# EAGLE board gloria (EAGLE 6.5.0)
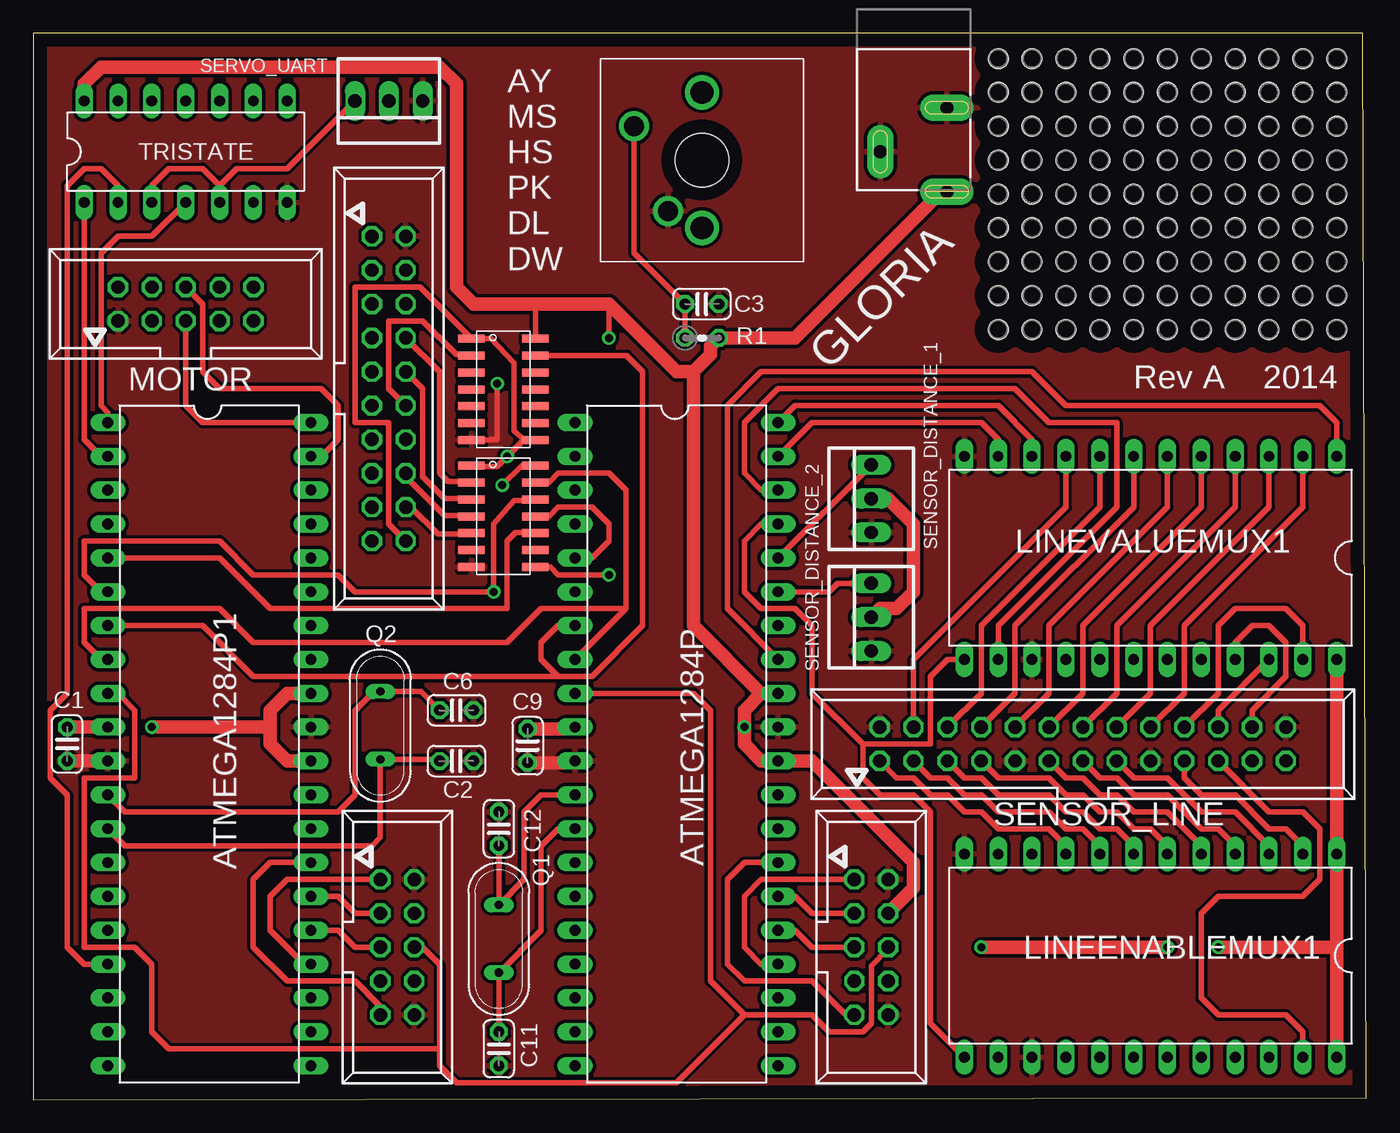
[diagram p0: board, top side]
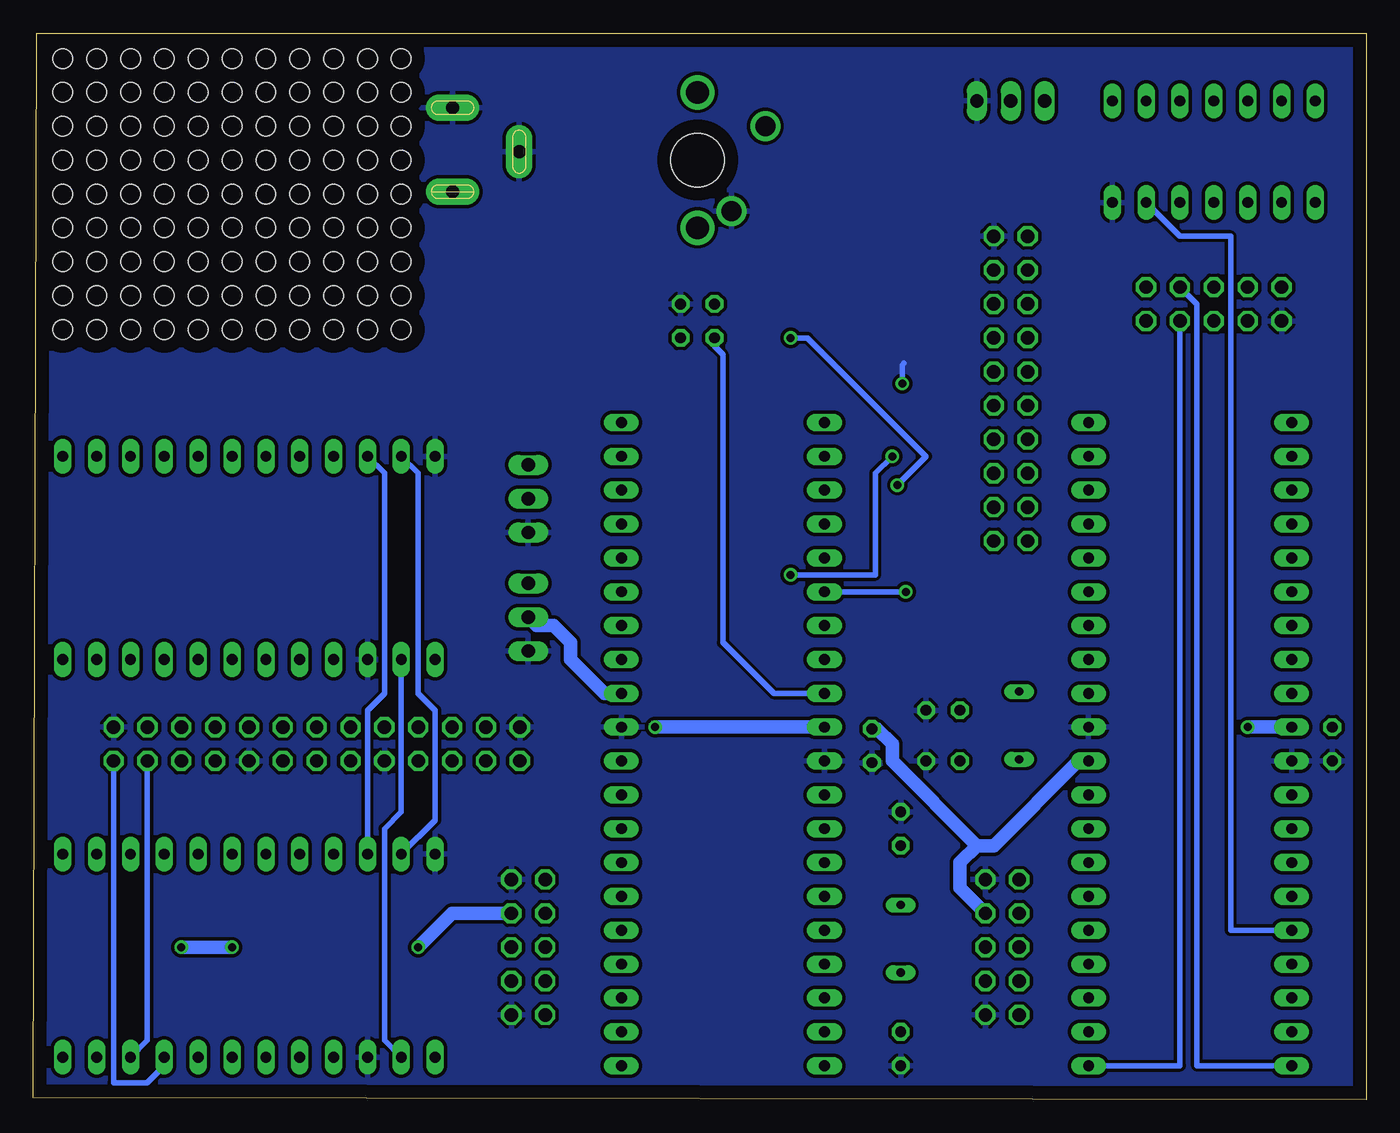
[diagram p1: board, bottom side, seen from below]

Size 100 x 80 mm. Coordinates in mm from the lower left corner, seen from the top.
Outline: 0,0 100,0.13 99.75,80 0,80 0,0
Copper layers (1*16): Top 0.035mm / dielectric 1.5mm / Bottom 0.035mm
Design rules "default": minimum track width 10mil, minimum drill 24mil, track to track 8mil, track to pad 8mil, pad to pad 8mil, via to via 8mil, smd to smd 8mil, copper to edge 40mil, drill to drill 8mil, minimum pad ring 10mil, minimum via ring 8mil, stop-mask expansion 4mil, vias tented up to drill 0mil, thermal gap 10mil
Net classes: 0 signal: width 0.254 mm, clearance 0.254 mm; 1 vcc: width 0.508 mm, clearance 0.254 mm

## Footprints (pad centres in the part's own frame; a part is rotated, then mirrored left to right if it is on the bottom)
DIL40 = drill 0.813 long: 1 -24.13,-7.62; 2 -21.59,-7.62; 3 -19.05,-7.62; 4 -16.51,-7.62; 5 -13.97,-7.62; 6 -11.43,-7.62; 7 -8.89,-7.62; 8 -6.35,-7.62; 9 -3.81,-7.62; 10 -1.27,-7.62; 11 1.27,-7.62; 12 3.81,-7.62; 13 6.35,-7.62; 14 8.89,-7.62; 15 11.43,-7.62; 16 13.97,-7.62; 17 16.51,-7.62; 18 19.05,-7.62; 19 21.59,-7.62; 20 24.13,-7.62; 21 24.13,7.62; 22 21.59,7.62; 23 19.05,7.62; 24 16.51,7.62; 25 13.97,7.62; 26 11.43,7.62; 27 8.89,7.62; 28 6.35,7.62; 29 3.81,7.62; 30 1.27,7.62; 31 -1.27,7.62; 32 -3.81,7.62; 33 -6.35,7.62; 34 -8.89,7.62; 35 -11.43,7.62; 36 -13.97,7.62; 37 -16.51,7.62; 38 -19.05,7.62; 39 -21.59,7.62; 40 -24.13,7.62
C025-024X044 = drill 0.813 octagon: 1 -1.27,0; 2 1.27,0
POWER_JACK_SLOT = drill 1 pad 2 long: GND@1 2.58,7.5; GND@2 7.58,10.8; PWR 2.58,13.8
1X11_HOLES_ONLY = drill 0.889 pad 0.813: 1 0,0; 2 2.54,0; 3 5.08,0; 4 7.62,0; 5 10.16,0; 6 12.7,0; 7 15.24,0; 8 17.78,0; 9 20.32,0; 10 22.86,0; 11 25.4,0 | hole 1.473: 0,0; 2.54,0; 5.08,0; 7.62,0; 10.16,0; 12.7,0; 15.24,0; 17.78,0; 20.32,0; 22.86,0; 25.4,0
057-010-1 = drill 1 octagon: 1 -5.08,-1.27; 2 -5.08,1.27; 3 -2.54,-1.27; 4 -2.54,1.27; 5 0,-1.27; 6 0,1.27; 7 2.54,-1.27; 8 2.54,1.27; 9 5.08,-1.27; 10 5.08,1.27
DIL24-6 = drill 0.813 long: 1 -13.97,-7.62; 2 -11.43,-7.62; 3 -8.89,-7.62; 4 -6.35,-7.62; 5 -3.81,-7.62; 6 -1.27,-7.62; 7 1.27,-7.62; 8 3.81,-7.62; 9 6.35,-7.62; 10 8.89,-7.62; 11 11.43,-7.62; 12 13.97,-7.62; 13 13.97,7.62; 14 11.43,7.62; 15 8.89,7.62; 16 6.35,7.62; 17 3.81,7.62; 18 1.27,7.62; 19 -1.27,7.62; 20 -3.81,7.62; 21 -6.35,7.62; 22 -8.89,7.62; 23 -11.43,7.62; 24 -13.97,7.62
QS = drill 0.61 long: 1 -2.54,0; 2 2.54,0
0204V = drill 0.813 octagon: 1 -1.27,0; 2 1.27,0
22-23-2031 = drill 1 long: 1 -2.54,0; 2 0,0; 3 2.54,0
057-026-1 = drill 1 octagon: 1 -15.24,-1.27; 2 -15.24,1.27; 3 -12.7,-1.27; 4 -12.7,1.27; 5 -10.16,-1.27; 6 -10.16,1.27; 7 -7.62,-1.27; 8 -7.62,1.27; 9 -5.08,-1.27; 10 -5.08,1.27; 11 -2.54,-1.27; 12 -2.54,1.27; 13 0,-1.27; 14 0,1.27; 15 2.54,-1.27; 16 2.54,1.27; 17 5.08,-1.27; 18 5.08,1.27; 19 7.62,-1.27; 20 7.62,1.27; 21 10.16,-1.27; 22 10.16,1.27; 23 12.7,-1.27; 24 12.7,1.27; 25 15.24,-1.27; 26 15.24,1.27
DIL14 = drill 0.813 long: 1 -7.62,-3.81; 2 -5.08,-3.81; 3 -2.54,-3.81; 4 0,-3.81; 5 2.54,-3.81; 6 5.08,-3.81; 7 7.62,-3.81; 8 7.62,3.81; 9 5.08,3.81; 10 2.54,3.81; 11 0,3.81; 12 -2.54,3.81; 13 -5.08,3.81; 14 -7.62,3.81
TXB0104 = smd 0.6 x 2: P$1 0.565,-0.4; P$2 1.835,-0.4; P$3 3.105,-0.4; P$4 4.375,-0.4; P$5 5.645,-0.4; P$6 6.915,-0.4; P$7 8.185,-0.4; P$8 8.185,4.4; P$9 6.915,4.4; P$10 5.645,4.4; P$11 4.375,4.4; P$12 3.105,4.4; P$13 1.835,4.4; P$14 0.565,4.4
CHERRY-MX-I = drill 1.714 pad 1.778: P$3 -5.08,0; P$4 5.08,0 | drill 1.5 pad 2.184: PIN-1 -3.81,2.54; PIN-2 2.54,5.08 | hole 4: 0,0
057-020-1 = drill 1 octagon: 1 -11.43,-1.27; 2 -11.43,1.27; 3 -8.89,-1.27; 4 -8.89,1.27; 5 -6.35,-1.27; 6 -6.35,1.27; 7 -3.81,-1.27; 8 -3.81,1.27; 9 -1.27,-1.27; 10 -1.27,1.27; 11 1.27,-1.27; 12 1.27,1.27; 13 3.81,-1.27; 14 3.81,1.27; 15 6.35,-1.27; 16 6.35,1.27; 17 8.89,-1.27; 18 8.89,1.27; 19 11.43,-1.27; 20 11.43,1.27

## Placement (x,y rotation side)
ATMEGA1284P  SENSOR UNIT  [DIL40]  48.26,26.67 270 top
ATMEGA1284P1  DRIVE UNIT  [DIL40]  13.21,26.67 270 top
C1  100n  [C025-024X044]  2.54,26.67 90 top
C2  22p  [C025-024X044]  31.75,25.4 180 top
C3  100n  [C025-024X044]  50.16,59.69 180 top
C6  22p  [C025-024X044]  31.75,29.21 180 top
C9  100n  [C025-024X044]  37.08,26.54 90 top
C11  22p  [C025-024X044]  34.92,3.81 90 top
C12  22p  [C025-024X044]  34.92,20.32 270 top
JP1  POWER_JACKSLT  [POWER_JACK_SLOT]  71.12,81.92 180 top
JP26  M11POGOPIN_HOLES_ONLY  [1X11_HOLES_ONLY]  72.39,78.11 0 top
JP27  M11POGOPIN_HOLES_ONLY  [1X11_HOLES_ONLY]  72.39,75.56 0 top
JP28  M11POGOPIN_HOLES_ONLY  [1X11_HOLES_ONLY]  72.39,73.03 0 top
JP29  M11POGOPIN_HOLES_ONLY  [1X11_HOLES_ONLY]  72.39,70.48 0 top
JP30  M11POGOPIN_HOLES_ONLY  [1X11_HOLES_ONLY]  72.39,67.94 0 top
JP31  M11POGOPIN_HOLES_ONLY  [1X11_HOLES_ONLY]  72.39,65.41 0 top
JP32  M11POGOPIN_HOLES_ONLY  [1X11_HOLES_ONLY]  72.39,62.87 0 top
JP33  M11POGOPIN_HOLES_ONLY  [1X11_HOLES_ONLY]  72.39,60.33 0 top
JP34  M11POGOPIN_HOLES_ONLY  [1X11_HOLES_ONLY]  72.39,57.78 0 top
JTAG_SEN  057-010-1  [057-010-1]  62.87,11.43 270 top
JTAG_STYR  057-010-1  [057-010-1]  27.3,11.43 270 top
LINEENABLEMUX1  4067N  [DIL24-6]  83.82,10.79 180 top
LINEVALUEMUX1  4067N  [DIL24-6]  83.82,40.64 180 top
MOTOR  057-010-1  [057-010-1]  11.43,59.69 0 top
Q1  16M  [QS]  34.92,12.06 90 top
Q2  16M  [QS]  26.04,28.07 90 top
R1  10k  [0204V]  50.16,57.15 0 top
SENSOR_DISTANCE_1  22-23-2031  [22-23-2031]  62.87,45.09 90 top
SENSOR_DISTANCE_2  22-23-2031  [22-23-2031]  62.87,36.2 90 top
SENSOR_LINE  057-026-1  [057-026-1]  78.74,26.67 0 top
SERVO_UART  22-23-2031  [22-23-2031]  26.67,74.93 180 top
TRISTATE  74LS125N  [DIL14]  11.43,71.12 0 top
U$1  TXB0104SOIC(D)  [TXB0104]  33.27,48.13 270 top
U$2  TXB0104SOIC(D)  [TXB0104]  33.27,57.66 270 top
U$6  CHERRY-MX-I  [CHERRY-MX-I]  50.16,70.48 90 top
X  057-020-1  [057-020-1]  26.67,53.34 270 top

## Library data of the parts
ATMEGA1284P ATMEGA1284P1 = 1284p
C1-C3 C6 C9 C11 C12 R1 = rcl
JP1 = SparkFun-Connectors; PROD_ID: PRT-00119
JP26-JP34 = SparkFun-Connectors
JTAG_SEN JTAG_STYR MOTOR SENSOR_LINE X = con-panduit; OC_FARNELL: unknown; OC_NEWARK: unknown
LINEENABLEMUX1 LINEVALUEMUX1 = 40xx
Q1 Q2 = special
SENSOR_DISTANCE_1 SENSOR_DISTANCE_2 SERVO_UART = con-molex; MF: MOLEX; MPN: 22-23-2031; OC_FARNELL: 1462950; OC_NEWARK: 30C0862
TRISTATE = 74xx-eu
U$1 U$2 = 3DRobotics_Master_Library; DATASHEET: http://focus.ti.com/lit/ds/symlink/txb0104.pdf; LINK: http://search.digikey.com/scripts/DkSearch/dksus.dll?Detail&name=296-21928-1-ND; MFGPN: TXB0104DR; PN: 296-21928-1-ND
U$6 = cherrymx

## Nets
DISTANCELEFT: ATMEGA1284P.36 SENSOR_DISTANCE_1.3
GND: ATMEGA1284P1.11 ATMEGA1284P1.31 ATMEGA1284P.11 ATMEGA1284P.31 C1.1 C2.1 C3.1 C6.1 C9.1 C11.1 C12.1 JP1.GND@1 JP1.GND@2 JTAG_SEN.2 JTAG_SEN.10 JTAG_STYR.2 JTAG_STYR.10 LINEENABLEMUX1.12 LINEENABLEMUX1.15 LINEVALUEMUX1.12 LINEVALUEMUX1.15 MOTOR.1 SENSOR_DISTANCE_1.1 SENSOR_DISTANCE_2.1 SENSOR_LINE.2 SENSOR_LINE.9 SENSOR_LINE.17 SENSOR_LINE.26 SERVO_UART.1 TRISTATE.7 U$1.P$7 U$2.P$7 U$6.PIN-1 X.2
LINEADDR0: ATMEGA1284P.40 LINEENABLEMUX1.10 LINEVALUEMUX1.10
LINEADDR1: ATMEGA1284P.39 LINEENABLEMUX1.11 LINEVALUEMUX1.11
LINEADDR2: ATMEGA1284P.38 LINEENABLEMUX1.14 LINEVALUEMUX1.14
LINEADDR3: ATMEGA1284P.37 LINEENABLEMUX1.13 LINEVALUEMUX1.13
LINEVALUE: ATMEGA1284P.33 LINEVALUEMUX1.1
MISO: ATMEGA1284P1.7 ATMEGA1284P.7 U$2.P$13
MOSI: ATMEGA1284P1.6 ATMEGA1284P.6 U$1.P$12
N$1: ATMEGA1284P.27 JTAG_SEN.9
N$2: ATMEGA1284P1.24 JTAG_STYR.1
N$3: ATMEGA1284P.26 JTAG_SEN.3
N$4: ATMEGA1284P.25 JTAG_SEN.5
N$5: ATMEGA1284P.24 JTAG_SEN.1
N$6: ATMEGA1284P1.27 JTAG_STYR.9
N$7: ATMEGA1284P1.26 JTAG_STYR.3
N$8: ATMEGA1284P1.25 JTAG_STYR.5
N$9: ATMEGA1284P1.21 MOTOR.7
N$10: LINEENABLEMUX1.9 SENSOR_LINE.1
N$11: LINEENABLEMUX1.8 SENSOR_LINE.3
N$12: LINEENABLEMUX1.7 SENSOR_LINE.5
N$13: LINEENABLEMUX1.6 SENSOR_LINE.7
N$14: LINEENABLEMUX1.5 SENSOR_LINE.11
N$15: LINEENABLEMUX1.4 SENSOR_LINE.13
N$16: LINEENABLEMUX1.3 SENSOR_LINE.15
N$17: LINEENABLEMUX1.2 SENSOR_LINE.19
N$18: LINEENABLEMUX1.23 SENSOR_LINE.21
N$19: LINEENABLEMUX1.22 SENSOR_LINE.23
N$20: LINEENABLEMUX1.21 SENSOR_LINE.25
N$21: LINEVALUEMUX1.9 SENSOR_LINE.4
N$22: LINEVALUEMUX1.8 SENSOR_LINE.6
N$23: LINEVALUEMUX1.7 SENSOR_LINE.8
N$24: LINEVALUEMUX1.6 SENSOR_LINE.10
N$25: LINEVALUEMUX1.5 SENSOR_LINE.12
N$26: LINEVALUEMUX1.4 SENSOR_LINE.14
N$27: LINEVALUEMUX1.3 SENSOR_LINE.16
N$28: LINEVALUEMUX1.2 SENSOR_LINE.18
N$29: LINEVALUEMUX1.23 SENSOR_LINE.20
N$30: LINEVALUEMUX1.22 SENSOR_LINE.22
N$31: LINEVALUEMUX1.21 SENSOR_LINE.24
N$32: ATMEGA1284P.35 SENSOR_DISTANCE_2.3
N$33: U$1.P$1 U$1.P$8 U$2.P$1 U$2.P$8 X.20
N$34: ATMEGA1284P1.40 MOTOR.5
N$35: U$1.P$2 X.8
N$36: U$1.P$3 X.10
N$37: U$2.P$2 X.12
N$38: U$1.P$4 X.16
N$39: U$1.P$5 X.18
N$40: ATMEGA1284P1.39 MOTOR.6
N$41: ATMEGA1284P.12 C12.2 Q1.2
N$42: ATMEGA1284P1.20 MOTOR.8
N$43: ATMEGA1284P.13 C11.2 Q1.1
N$44: ATMEGA1284P1.12 C6.2 Q2.2
N$45: ATMEGA1284P1.13 C2.2 Q2.1
RESET: ATMEGA1284P1.9 ATMEGA1284P.9 C3.2 JTAG_SEN.6 JTAG_STYR.6 R1.1 U$6.PIN-2
SCK: ATMEGA1284P1.8 ATMEGA1284P.8 U$1.P$13
SERVOUART: SERVO_UART.3 TRISTATE.3 TRISTATE.5
SS0: ATMEGA1284P1.5 U$1.P$10
SS1: ATMEGA1284P.5 U$1.P$11
STYR_UART_RX_E: ATMEGA1284P1.1 TRISTATE.4
STYR_UART_TX_E: ATMEGA1284P1.2 TRISTATE.1
UART1RX: ATMEGA1284P1.16 TRISTATE.6
UART1TX: ATMEGA1284P1.17 TRISTATE.2
VCC: ATMEGA1284P1.10 ATMEGA1284P1.30 ATMEGA1284P1.32 ATMEGA1284P.10 ATMEGA1284P.30 ATMEGA1284P.32 C1.2 C9.2 JP1.PWR JTAG_SEN.4 JTAG_STYR.4 LINEENABLEMUX1.1 LINEENABLEMUX1.24 LINEVALUEMUX1.24 R1.2 SENSOR_DISTANCE_1.2 SENSOR_DISTANCE_2.2 TRISTATE.14 U$1.P$14 U$2.P$14

## Tracks (layer width: path | path; a pad name or v marks a point on that pad's centre or on a via)
DISTANCELEFT
  Top 0.406: SENSOR_DISTANCE_1.3 ATMEGA1284P.36
GND  (via drill 0.6)
  Top 0.406: U$2.P$7 34.23,49.47 34.29,49.53 34.8,49.53 v34.8,53.72
  Top 1.016: C1.1 ATMEGA1284P1.11 | C9.1 40.51,25.27 ATMEGA1284P.11
  Bottom 0.406: v34.8,53.72 34.8,55.12 34.67,55.24
  pour Top: -1.27,81.28 -1.27,-1.27 101.6,-1.27 101.6,81.28
  pour Bottom: -1.27,81.28 -1.27,-1.27 101.6,-1.27 101.6,81.28
LINEADDR0
  Top 0.406: LINEVALUEMUX1.10 74.93,49.53 72.39,52.07 57.15,52.07 ATMEGA1284P.40
  Bottom 0.406: LINEENABLEMUX1.10 74.93,29.21 73.66,30.48 73.66,46.99 LINEVALUEMUX1.10
LINEADDR1
  Top 0.406: ATMEGA1284P.39 58.42,50.8 71.12,50.8 72.39,49.53 LINEVALUEMUX1.11
  Bottom 0.406: LINEVALUEMUX1.11 71.12,46.99 71.12,30.48 69.85,29.21 69.85,20.95 LINEENABLEMUX1.11
LINEADDR2
  Top 0.406: ATMEGA1284P.38 54.61,45.72 53.34,46.99 53.34,50.8 55.88,53.34 73.66,53.34 76.2,50.8 81.28,50.8 81.28,44.45 72.39,35.56 LINEVALUEMUX1.14
  Bottom 0.406: LINEVALUEMUX1.14 72.39,21.59 73.66,20.32 73.66,4.45 LINEENABLEMUX1.14
LINEADDR3
  Top 0.406: LINEVALUEMUX1.13 68.58,33.02 67.31,31.75 67.31,26.67 62.23,26.67 | 62.23,26.67 62.23,24.13 63.5,22.86 66.04,22.86 67.31,21.59 67.31,5.71 LINEENABLEMUX1.13 | ATMEGA1284P.37 54.61,43.18 53.34,41.91 53.34,38.1 54.61,36.83 57.15,36.83 58.42,35.56 58.42,30.48 62.23,26.67
LINEVALUE
  Top 0.406: ATMEGA1284P.33 52.07,36.83 52.07,52.07 54.61,54.61 74.93,54.61 77.47,52.07 96.52,52.07 97.79,50.8 LINEVALUEMUX1.1
MISO
  Top 0.406: U$2.P$13 44.51,55.82 45.72,54.61 45.72,35.56 41.91,31.75 39.37,31.75 | 39.37,31.75 38.1,33.02 38.1,34.29 39.37,35.56 ATMEGA1284P.7 | ATMEGA1284P1.7 12.7,35.56 16.51,31.75 39.37,31.75
MOSI  (via drill 0.6)
  Top 0.406: ATMEGA1284P1.6 5.08,38.1 3.81,39.37 3.81,41.91 13.97,41.91 16.51,39.37 22.86,39.37 24.13,38.1 v34.54,38.1 34.54,43.18 36.07,44.96 37.6,44.96 U$1.P$12
  Bottom 0.406: ATMEGA1284P.6 v34.54,38.1
N$1
  Top 0.406: JTAG_SEN.9 60.96,6.35 58.42,8.89 53.34,8.89 52.07,10.16 52.07,16.51 53.34,17.78 ATMEGA1284P.27
N$2
  Top 0.406: ATMEGA1284P1.24 20.32,10.16 17.78,12.7 17.78,15.24 19.05,16.51 JTAG_STYR.1
N$3
  Top 0.406: ATMEGA1284P.26 57.15,15.24 58.42,13.97 JTAG_SEN.3
N$4
  Top 0.406: ATMEGA1284P.25 57.15,12.7 58.42,11.43 JTAG_SEN.5
N$5
  Top 0.406: ATMEGA1284P.24 54.61,10.16 53.34,11.43 53.34,15.24 54.61,16.51 JTAG_SEN.1
N$6
  Top 0.406: JTAG_STYR.9 26.04,6.99 24.13,8.89 19.05,8.89 16.51,11.43 16.51,16.51 17.78,17.78 ATMEGA1284P1.27
N$7
  Top 0.406: ATMEGA1284P1.26 22.86,15.24 24.13,13.97 JTAG_STYR.3
N$8
  Top 0.406: ATMEGA1284P1.25 22.86,12.7 24.13,11.43 JTAG_STYR.5
N$9
  Bottom 0.406: ATMEGA1284P1.21 13.97,2.54 MOTOR.7
N$10
  Top 0.406: SENSOR_LINE.1 64.77,24.13 66.04,24.13 67.31,22.86 68.58,22.86 69.85,21.59 71.12,21.59 72.39,20.32 76.2,20.32 77.47,19.05 LINEENABLEMUX1.9
N$11
  Top 0.406: SENSOR_LINE.3 67.31,24.13 68.58,24.13 69.85,22.86 71.12,22.86 72.39,21.59 76.2,21.59 77.47,20.32 78.74,20.32 80.01,19.05 LINEENABLEMUX1.8
N$12
  Top 0.406: SENSOR_LINE.5 69.85,24.13 71.12,24.13 72.39,22.86 76.2,22.86 77.47,21.59 78.74,21.59 80.01,20.32 81.28,20.32 82.55,19.05 LINEENABLEMUX1.7
N$13
  Top 0.406: SENSOR_LINE.7 72.39,24.13 76.2,24.13 77.47,22.86 78.74,22.86 80.01,21.59 81.28,21.59 82.55,20.32 83.82,20.32 85.09,19.05 LINEENABLEMUX1.6
N$14
  Top 0.406: SENSOR_LINE.11 77.47,24.13 78.74,24.13 80.01,22.86 81.28,22.86 82.55,21.59 85.09,21.59 87.63,19.05 LINEENABLEMUX1.5
N$15
  Top 0.406: SENSOR_LINE.13 80.01,24.13 81.28,24.13 82.55,22.86 85.09,22.86 87.63,20.32 88.9,20.32 90.17,19.05 LINEENABLEMUX1.4
N$16
  Top 0.406: SENSOR_LINE.15 82.55,24.13 85.09,24.13 87.63,21.59 90.17,21.59 92.71,19.05 LINEENABLEMUX1.3
N$17
  Top 0.406: SENSOR_LINE.19 86.36,24.13 87.63,22.86 90.17,22.86 92.71,20.32 93.98,20.32 95.25,19.05 LINEENABLEMUX1.2
N$18
  Top 0.406: SENSOR_LINE.21 92.71,21.59 95.25,21.59 96.52,20.32 96.52,16.51 95.25,15.24 88.9,15.24 87.63,13.97 87.63,7.62 88.9,6.35 93.98,6.35 95.25,5.08 LINEENABLEMUX1.23
N$19
  Bottom 0.406: SENSOR_LINE.23 91.44,4.45 LINEENABLEMUX1.22
N$20
  Bottom 0.406: SENSOR_LINE.25 93.98,1.27 91.44,1.27 90.17,2.54 LINEENABLEMUX1.21
N$21
  Top 0.406: SENSOR_LINE.4 66.04,33.02 77.47,44.45 LINEVALUEMUX1.9
N$22
  Top 0.406: SENSOR_LINE.6 71.12,30.48 71.12,35.56 80.01,44.45 LINEVALUEMUX1.8
N$23
  Top 0.406: SENSOR_LINE.8 73.66,30.48 73.66,35.56 82.55,44.45 LINEVALUEMUX1.7
N$24
  Top 0.406: SENSOR_LINE.10 76.2,30.48 76.2,35.56 85.09,44.45 LINEVALUEMUX1.6
N$25
  Top 0.406: SENSOR_LINE.12 78.74,30.48 78.74,35.56 87.63,44.45 LINEVALUEMUX1.5
N$26
  Top 0.406: SENSOR_LINE.14 81.28,30.48 81.28,35.56 90.17,44.45 LINEVALUEMUX1.4
N$27
  Top 0.406: SENSOR_LINE.16 83.82,30.48 83.82,35.56 92.71,44.45 LINEVALUEMUX1.3
N$28
  Top 0.406: SENSOR_LINE.18 86.36,30.48 86.36,35.56 95.25,44.45 LINEVALUEMUX1.2
N$29
  Top 0.406: SENSOR_LINE.20 88.9,30.48 88.9,35.56 90.17,36.83 93.98,36.83 95.25,35.56 LINEVALUEMUX1.23
N$30
  Top 0.406: SENSOR_LINE.22 88.9,29.21 LINEVALUEMUX1.22
N$31
  Top 0.406: LINEVALUEMUX1.21 90.17,34.29 91.44,35.56 92.71,35.56 93.98,34.29 93.98,31.75 91.44,29.21 SENSOR_LINE.24
N$32
  Top 0.406: SENSOR_DISTANCE_2.3 60.33,38.73 59.69,38.1 ATMEGA1284P.35
N$33  (via drill 0.6)
  Top 0.406: U$1.P$1 32.94,47.5 34.8,47.5 v35.56,48.26 36.77,49.47 U$2.P$8 37.62,49.53 36.83,49.53 36.07,50.16 36.07,55.24 34.35,57.09 U$2.P$1 29.01,60.96 24.13,60.96 24.13,50.8 26.67,50.8 26.67,43.18 X.20 | U$1.P$8 38.79,39.95 39.37,39.37 v43.18,39.37
  Bottom 0.406: v43.18,39.37 36.83,39.37 36.83,46.99 v35.56,48.26
N$34
  Top 0.406: ATMEGA1284P1.40 12.7,50.8 11.43,52.07 MOTOR.5
N$35
  Top 0.406: X.8 30.48,54.61 30.48,46.99 31.11,46.35 32.82,46.35 U$1.P$2
N$36
  Top 0.406: X.10 29.21,53.34 29.21,46.74 30.86,45.09 32.82,45.09 U$1.P$3
N$37
  Top 0.406: X.12 26.67,53.34 26.67,58.42 29.21,58.42 31.75,55.88 32.82,55.88 U$2.P$2
N$38
  Top 0.406: X.16 27.94,46.74 30.86,43.81 32.82,43.81 U$1.P$4
N$39
  Top 0.406: X.18 28.32,44.45 30.35,42.42 32.8,42.42 U$1.P$5
N$40
  Top 0.406: ATMEGA1284P1.39 21.59,48.26 22.86,49.53 22.86,52.07 21.59,53.34 13.97,53.34 12.7,54.61 12.7,59.69 MOTOR.6
N$41
  Top 0.406: C12.2 Q1.2 36.83,16.51 36.83,21.59 38.1,22.86 ATMEGA1284P.12
N$42
  Bottom 0.406: ATMEGA1284P1.20 12.7,2.54 12.7,59.69 MOTOR.8
N$43
  Top 0.406: C11.2 Q1.1 38.1,12.7 38.1,19.05 39.37,20.32 ATMEGA1284P.13
N$44
  Top 0.406: ATMEGA1284P1.12 6.86,21.59 22.86,21.59 24.13,22.86 24.13,29.21 25.4,30.48 25.91,30.48 Q2.2 29.08,30.61 C6.2
N$45
  Top 0.406: ATMEGA1284P1.13 6.86,19.05 25.4,19.05 26.04,19.68 Q2.1 30.35,25.53 C2.2
N$47  (via drill 0.6)
  other vias: 34.8,53.72
RESET
  Top 0.406: JTAG_SEN.6 64.14,11.3 62.87,10.03 62.87,5.71 62.23,5.08 59.69,5.08 58.42,6.35 53.34,6.35 | 53.34,6.35 50.8,8.89 50.8,29.21 49.53,30.48 ATMEGA1284P.9 | JTAG_STYR.6 29.21,11.43 30.48,10.16 30.48,3.81 | 30.48,3.81 30.48,2.54 31.75,1.27 48.26,1.27 53.34,6.35 | ATMEGA1284P1.9 6.35,30.48 7.62,29.21 7.62,24.13 3.81,24.13 3.81,11.43 7.62,11.43 8.89,10.16 8.89,5.08 10.16,3.81 30.48,3.81 | U$6.PIN-2 45.09,63.5 C3.2 R1.1
  Bottom 0.406: R1.1 48.9,56.52 48.26,55.88 48.26,34.29 44.45,30.48 ATMEGA1284P.9
SCK
  Top 0.406: U$1.P$13 38.68,46.3 39.37,46.99 43.18,46.99 44.45,45.72 44.45,36.83 | 44.45,36.83 ATMEGA1284P.8 | ATMEGA1284P1.8 5.08,33.02 3.81,34.29 3.81,36.83 13.97,36.83 16.51,34.29 35.56,34.29 38.1,36.83 44.45,36.83
SERVOUART
  Top 0.406: TRISTATE.3 8.89,68.58 10.16,69.85 12.7,69.85 13.97,68.58 | TRISTATE.5 13.97,68.58 | 13.97,68.58 15.24,69.85 19.05,69.85 SERVO_UART.3
SS0
  Top 0.406: ATMEGA1284P1.5 13.97,40.64 17.78,36.83 35.56,36.83 35.56,41.91 36.2,42.55 37.62,42.55 U$1.P$10
SS1
  Top 0.406: U$1.P$11 38.68,43.76 39.37,44.45 41.91,44.45 43.18,43.18 43.18,41.91 41.91,40.64 ATMEGA1284P.5
STYR_UART_RX_E
  Top 0.406: ATMEGA1284P1.1 5.59,51.56 5.08,52.07 5.08,63.5 6.35,64.77 8.89,64.77 TRISTATE.4
STYR_UART_TX_E
  Top 0.406: TRISTATE.1 3.81,49.53 5.08,48.26 ATMEGA1284P1.2
UART1RX
  Bottom 0.406: ATMEGA1284P1.16 10.16,12.7 10.16,64.77 13.97,64.77 TRISTATE.6
UART1TX
  Top 0.406: TRISTATE.2 6.35,68.58 5.08,69.85 3.81,69.85 2.54,68.58 2.54,30.48 1.27,29.21 1.27,24.13 2.54,22.86 2.54,11.43 3.81,10.16 ATMEGA1284P1.17
VCC  (via drill 0.6)
  Top 0.406: U$2.P$14 37.67,59.26 38.1,59.69 | U$1.P$14 36.66,47.58 v35.18,46.1 | v43.18,57.15 43.18,59.69
  Top 1.016: JP1.PWR 68.11,68.11 57.15,57.15 R1.2 50.8,56.52 50.8,55.88 49.53,54.61 | LINEENABLEMUX1.24 97.79,11.43 | 97.79,11.43 LINEENABLEMUX1.1 LINEVALUEMUX1.24 | 54.61,30.48 53.34,29.21 v53.34,27.94 53.34,26.67 54.61,25.4 ATMEGA1284P.30 58.42,25.4 66.04,17.78 66.04,15.88 JTAG_SEN.4 | ATMEGA1284P1.30 19.05,25.4 17.78,26.67 17.78,27.94 | 17.78,27.94 17.78,29.21 19.05,30.48 ATMEGA1284P1.32 | 49.53,54.61 48.26,54.61 43.18,59.69 38.1,59.69 33.02,59.69 31.75,60.96 31.75,76.2 30.48,77.47 5.08,77.47 3.81,76.2 TRISTATE.14 | v8.89,27.94 17.78,27.94 | C1.2 ATMEGA1284P1.10 | C9.2 40.51,27.81 ATMEGA1284P.10 | v71.12,11.43 v85.09,11.43 | v88.9,11.43 97.79,11.43 | ATMEGA1284P.32 54.61,30.48 | 54.61,30.48 49.53,35.56 49.53,54.61 | SENSOR_DISTANCE_1.2 64.14,45.09 66.04,43.18 66.04,38.1 64.77,36.83 63.5,36.83 SENSOR_DISTANCE_2.2
  Bottom 0.406: v35.18,46.1 33.02,48.26 41.91,57.15 v43.18,57.15
  Bottom 1.016: ATMEGA1284P1.10 v8.89,27.94 | ATMEGA1284P1.30 21.59,25.4 27.94,19.05 29.21,19.05 | 29.21,19.05 30.48,17.78 30.48,15.88 JTAG_STYR.4 | C9.2 36.7,27.81 35.56,26.67 35.56,25.4 29.21,19.05 | ATMEGA1284P.10 v53.34,27.94 | JTAG_SEN.4 68.58,13.97 v71.12,11.43 | v85.09,11.43 v88.9,11.43 | ATMEGA1284P.32 57.15,30.48 59.69,33.02 59.69,34.29 60.96,35.56 62.23,35.56 SENSOR_DISTANCE_2.2

## Text on the board
tNames: AY / MS / HS / PK / DL / DW | GLORIA | Rev A 2014